# Altium PCB BCM_ECU_revA_V3.PcbDoc (part 7 of 7)
Units mm, origin at the board's own origin, x right, y up, seen from the top; angles counter-clockwise.
Board outline 109.5 x 156 mm, 4 copper layers (TOP SIG, GND, PWR, BOT SIG), stack 0.603 mm thick; 580 components, 446 nets, 1965 pads, 870 vias.
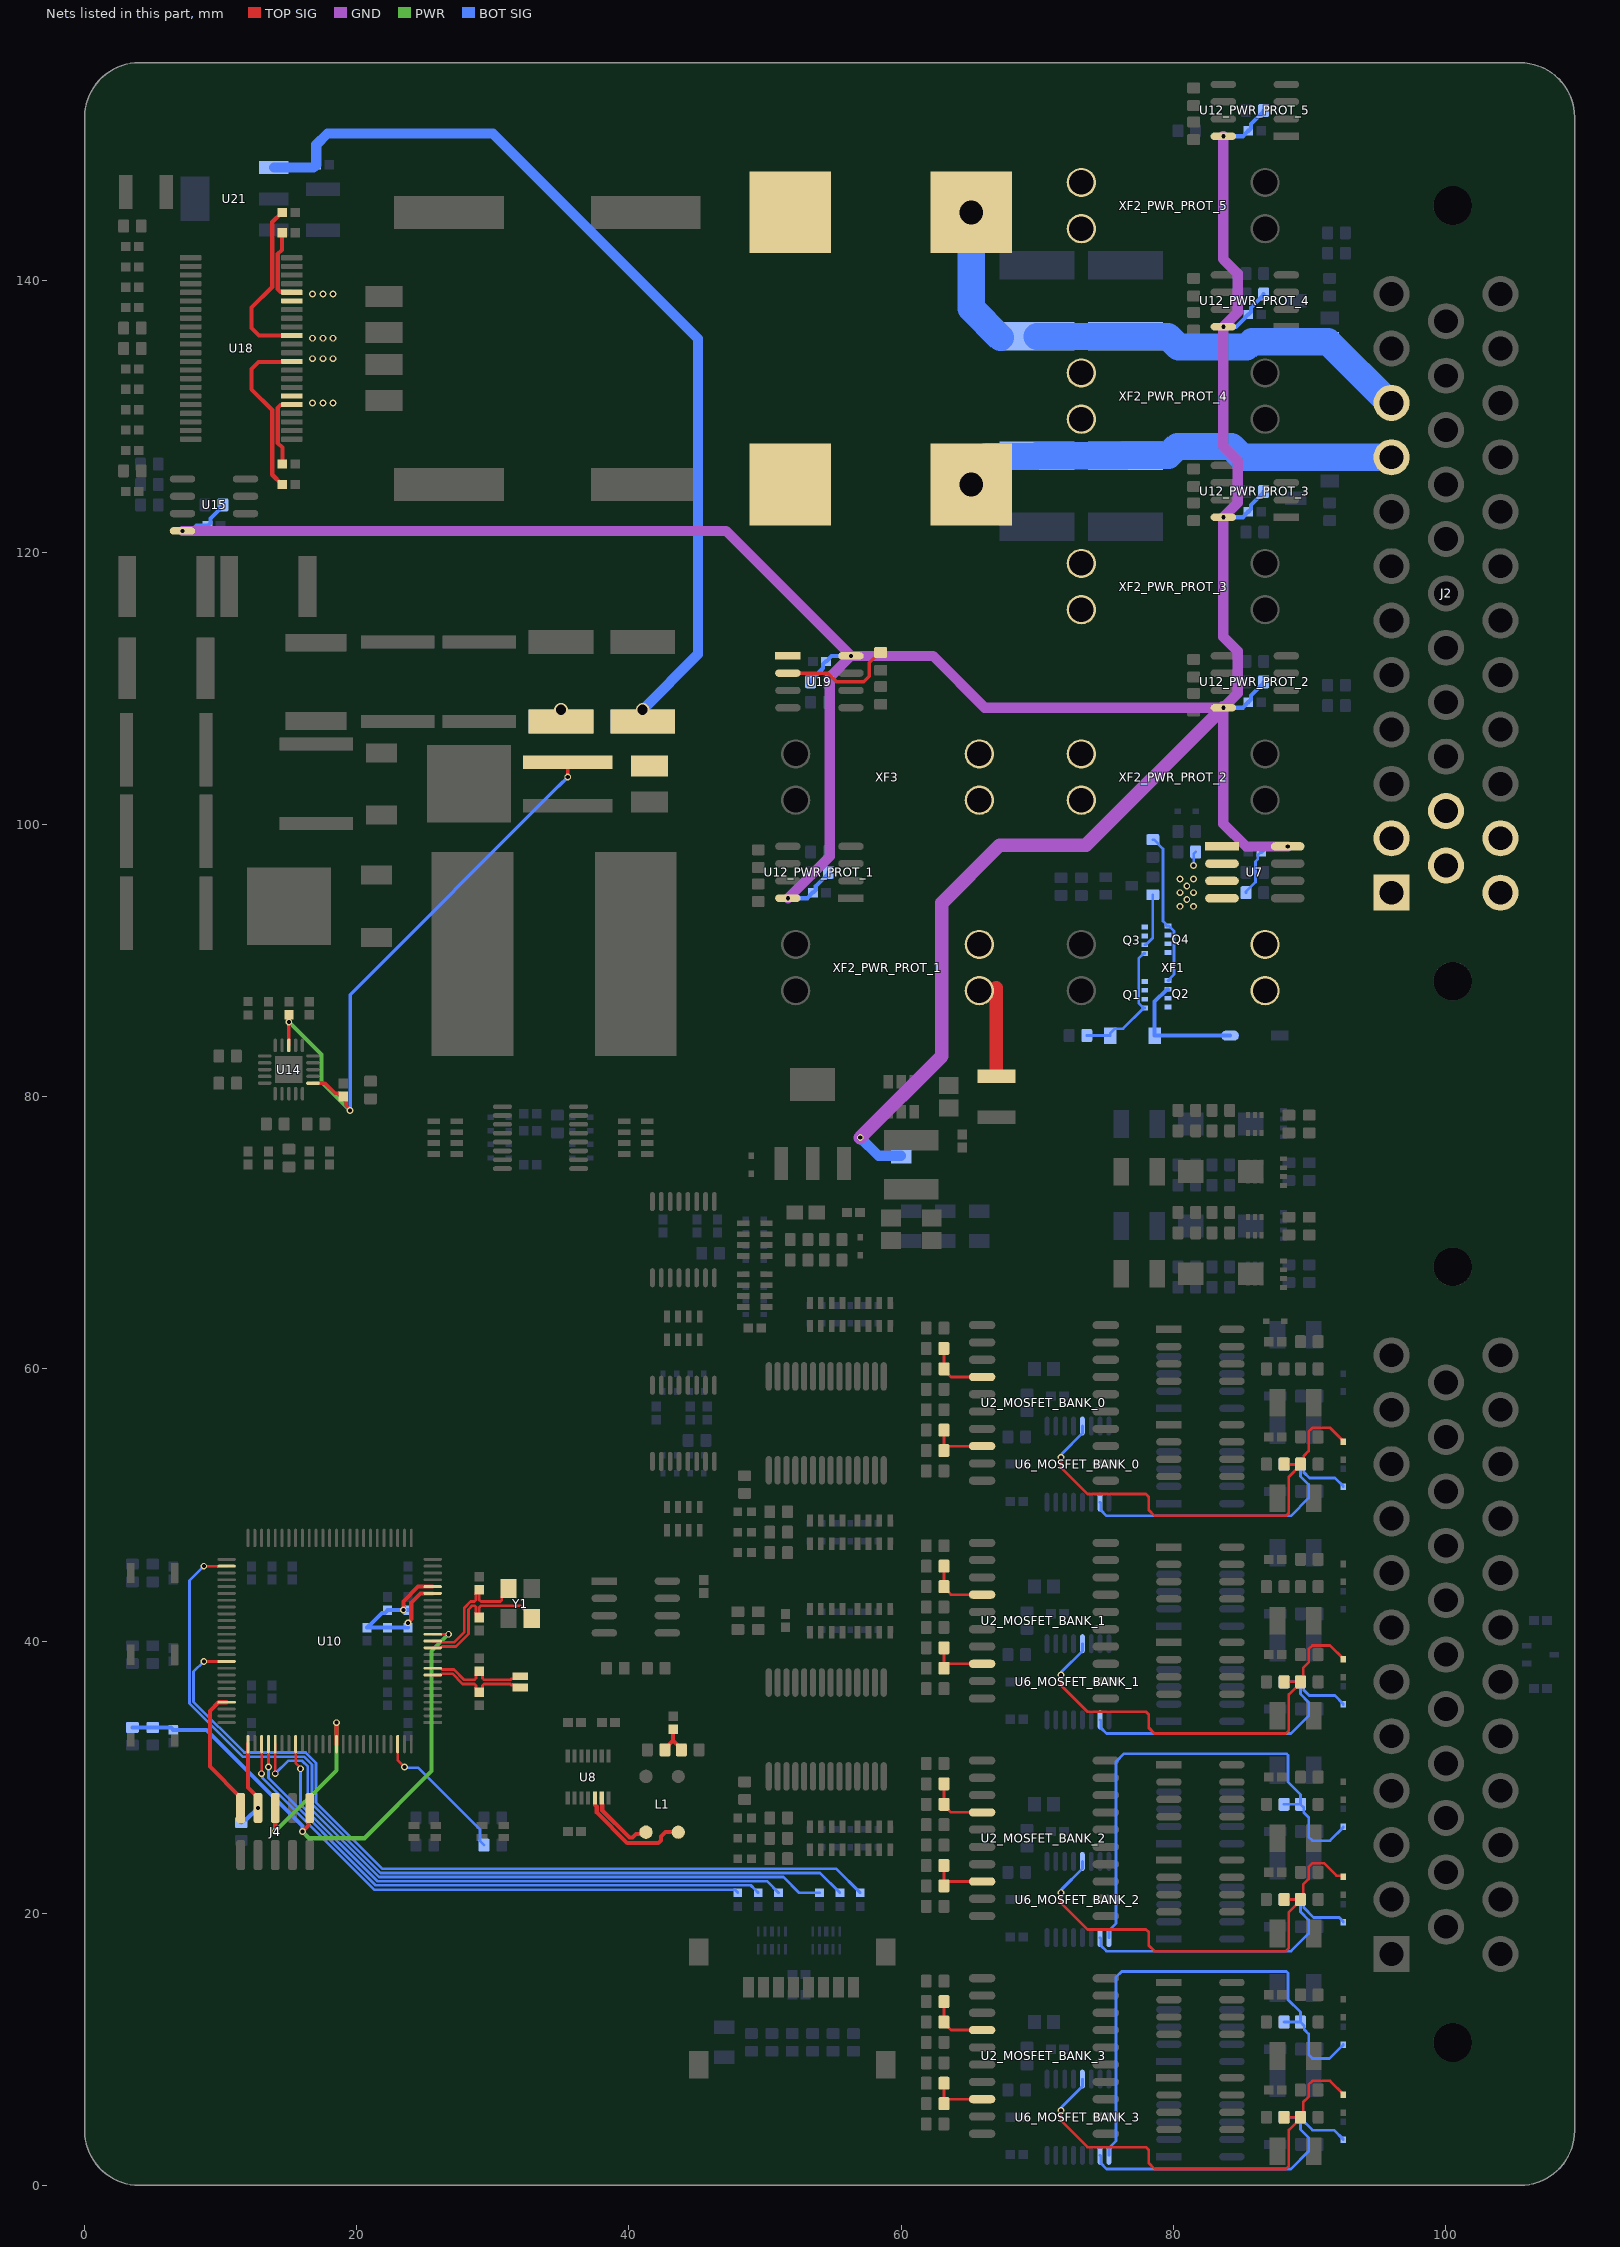
[diagram p8: the nets of this part, all layers, seen from the top]

## Via types
v1: diameter 0.5, hole 0.3, TOP SIG to BOT SIG, tented both sides, 797 vias
v2: diameter 1, hole 0.75, TOP SIG to BOT SIG, tented both sides, 56 vias
v3: diameter 4, hole 2.5, TOP SIG to BOT SIG, 9 vias
v4: diameter 0.75, hole 0.5, TOP SIG to BOT SIG, tented both sides, 6 vias
v5: diameter 2, hole 1.75, TOP SIG to BOT SIG, tented both sides, 2 vias

## Nets (pads, with @x,y where several pads share a name; then routed paths per layer and width w, separated by ;. In a path a pad name is that pad's centre, name@x,y a point inside that pad or via, vN(x,y) a via of type N, cw(c..) or ccw(c..) an arc to the next point about the centre after c; other vN are vias at no path point) (continued)
PD_2_MOSFET_BANK_2: D42_MOSFET_BANK_2.1 R19_MOSFET_BANK_2.1 R23_MOSFET_BANK_2.1 U6_MOSFET_BANK_2.9 | length 37
  BOT SIG w0.2: U6_MOSFET_BANK_2.9@75.275,18.2 75.275,18.725 75.802,19.252 75.802,31.125 76.394,31.718 88.322,31.718 88.44,31.6 88.44,29.634 89.35,28.724 R23_MOSFET_BANK_2.1@89.35,28 ; R19_MOSFET_BANK_2.1@88.15,28 R23_MOSFET_BANK_2.1@89.35,28 ; D42_MOSFET_BANK_2.1@92.5,26.34 92.5,26.3 91.524,25.324 90.225,25.324 89.952,25.597 89.952,27.048 89.595,27.405 89.595,27.755 R23_MOSFET_BANK_2.1@89.35,28
PD_2_MOSFET_BANK_3: D42_MOSFET_BANK_3.1 R19_MOSFET_BANK_3.1 R23_MOSFET_BANK_3.1 U6_MOSFET_BANK_3.9 | length 37.1
  BOT SIG w0.2: U6_MOSFET_BANK_3.9@75.275,2.2 75.275,2.725 75.802,3.252 75.802,15.302 76.218,15.718 88.322,15.718 88.44,15.6 88.44,13.634 89.35,12.724 R23_MOSFET_BANK_3.1@89.35,12 ; R19_MOSFET_BANK_3.1@88.15,12 R23_MOSFET_BANK_3.1@89.35,12 ; D42_MOSFET_BANK_3.1@92.5,10.34 92.5,10.3 92.4,10.2 92.36,10.2 91.484,9.324 90.225,9.324 89.952,9.597 89.952,11.118 89.63,11.44 89.63,11.72 R23_MOSFET_BANK_3.1@89.35,12
PD_3_MOSFET_BANK_0: D43_MOSFET_BANK_0.1 R20_MOSFET_BANK_0.1 R24_MOSFET_BANK_0.1 U6_MOSFET_BANK_0.5 | length 33.5
  TOP SIG w0.2: v1(71.75,53.5) 71.75,52.75 73.7,50.8 78,50.8 78.2,50.6 78.2,49.627 78.625,49.202 88.275,49.202 88.5,49.427 88.5,52.075 89.35,52.925 R24_MOSFET_BANK_0.1@89.35,53 ; R20_MOSFET_BANK_0.1@88.15,53 R24_MOSFET_BANK_0.1@89.35,53 ; D43_MOSFET_BANK_0.1@92.5,54.66 92.5,54.7 91.523,55.677 90.225,55.677 89.952,55.403 89.952,53.952 89.595,53.595 89.595,53.246 R24_MOSFET_BANK_0.1@89.35,53
  BOT SIG w0.2: v1(71.75,53.5) 71.807,53.558 71.807,53.758 73.325,55.275 U6_MOSFET_BANK_0.5@73.325,55.8
PD_3_MOSFET_BANK_1: D43_MOSFET_BANK_1.1 R20_MOSFET_BANK_1.1 R24_MOSFET_BANK_1.1 U6_MOSFET_BANK_1.5 | length 33.5
  TOP SIG w0.2: v1(71.75,37.5) 71.75,36.75 73.7,34.8 78,34.8 78.2,34.6 78.2,33.627 78.625,33.202 88.275,33.202 88.5,33.427 88.5,36.075 89.35,36.925 R24_MOSFET_BANK_1.1@89.35,37 ; R20_MOSFET_BANK_1.1@88.15,37 R24_MOSFET_BANK_1.1@89.35,37 ; D43_MOSFET_BANK_1.1@92.5,38.66 92.5,38.7 91.523,39.677 90.225,39.677 89.952,39.403 89.952,38.432 89.55,38.031 89.55,37.2 R24_MOSFET_BANK_1.1@89.35,37
  BOT SIG w0.2: v1(71.75,37.5) 71.807,37.558 71.807,37.758 73.325,39.275 U6_MOSFET_BANK_1.5@73.325,39.8
PD_3_MOSFET_BANK_2: D43_MOSFET_BANK_2.1 R20_MOSFET_BANK_2.1 R24_MOSFET_BANK_2.1 U6_MOSFET_BANK_2.5 | length 33.4
  TOP SIG w0.2: v1(71.75,21.5) 71.75,20.75 73.7,18.8 78,18.8 78.2,18.6 78.2,17.627 78.625,17.202 88.275,17.202 88.5,17.427 88.5,20.075 89.35,20.925 R24_MOSFET_BANK_2.1@89.35,21 ; R20_MOSFET_BANK_2.1@88.15,21 R24_MOSFET_BANK_2.1@89.35,21 ; D43_MOSFET_BANK_2.1@92.5,22.66 92.408,22.752 92,22.752 91.075,23.677 90.225,23.677 89.952,23.403 89.952,22.5 89.55,22.099 89.55,21.2 R24_MOSFET_BANK_2.1@89.35,21
  BOT SIG w0.2: v1(71.75,21.5) 71.807,21.558 71.807,21.758 73.325,23.275 U6_MOSFET_BANK_2.5@73.325,23.8
PD_3_MOSFET_BANK_3: D43_MOSFET_BANK_3.1 R20_MOSFET_BANK_3.1 R24_MOSFET_BANK_3.1 U6_MOSFET_BANK_3.5 | length 33.5
  TOP SIG w0.2: v1(71.75,5.5) 71.75,4.75 73.7,2.8 78,2.8 78.2,2.6 78.2,1.627 78.625,1.202 88.275,1.202 88.5,1.427 88.5,4.075 89.55,5.125 89.55,6.099 89.952,6.5 89.952,7.403 90.225,7.677 91.523,7.677 92.5,6.7 D43_MOSFET_BANK_3.1@92.5,6.66 ; R20_MOSFET_BANK_3.1@88.15,5 R24_MOSFET_BANK_3.1@89.35,5
  BOT SIG w0.2: v1(71.75,5.5) 71.807,5.558 71.807,5.758 73.325,7.275 U6_MOSFET_BANK_3.5@73.325,7.8
PD_4_MOSFET_BANK_0: D44_MOSFET_BANK_0.1 R21_MOSFET_BANK_0.1 R25_MOSFET_BANK_0.1 U6_MOSFET_BANK_0.10 | length 24.4
  BOT SIG w0.2: U6_MOSFET_BANK_0.10@74.625,50.2 74.674,50.151 74.674,49.626 75.098,49.202 88.653,49.202 89.952,50.5 89.952,51.5 89.35,52.102 R25_MOSFET_BANK_0.1@89.35,52.65 ; R21_MOSFET_BANK_0.1@88.15,53 R25_MOSFET_BANK_0.1@89.35,53 R25_MOSFET_BANK_0.1@89.35,52.65 ; D44_MOSFET_BANK_0.1@92.5,51.34 92.5,51.38 91.897,51.983 90.017,51.983 89.595,52.405 89.595,52.625 89.57,52.65 R25_MOSFET_BANK_0.1@89.35,52.65
PD_4_MOSFET_BANK_1: D44_MOSFET_BANK_1.1 R21_MOSFET_BANK_1.1 R25_MOSFET_BANK_1.1 U6_MOSFET_BANK_1.10 | length 24.4
  BOT SIG w0.2: U6_MOSFET_BANK_1.10@74.625,34.2 74.674,34.151 74.674,33.626 75.098,33.202 88.653,33.202 89.952,34.5 89.952,35.5 89.35,36.102 R25_MOSFET_BANK_1.1@89.35,36.65 ; R21_MOSFET_BANK_1.1@88.15,37 R25_MOSFET_BANK_1.1@89.35,37 R25_MOSFET_BANK_1.1@89.35,36.65 ; D44_MOSFET_BANK_1.1@92.5,35.34 92.5,35.38 91.88,36 90,36 89.595,36.405 89.595,36.625 89.57,36.65 R25_MOSFET_BANK_1.1@89.35,36.65
PD_4_MOSFET_BANK_2: D44_MOSFET_BANK_2.1 R21_MOSFET_BANK_2.1 R25_MOSFET_BANK_2.1 U6_MOSFET_BANK_2.10 | length 24.4
  BOT SIG w0.2: U6_MOSFET_BANK_2.10@74.625,18.2 74.674,18.151 74.674,17.626 75.098,17.202 88.653,17.202 89.952,18.5 89.952,19.5 89.35,20.102 R25_MOSFET_BANK_2.1@89.35,20.65 ; R21_MOSFET_BANK_2.1@88.15,21 R25_MOSFET_BANK_2.1@89.35,21 R25_MOSFET_BANK_2.1@89.35,20.65 ; D44_MOSFET_BANK_2.1@92.5,19.34 92.5,19.38 92.203,19.677 90.323,19.677 89.595,20.405 89.595,20.625 89.57,20.65 R25_MOSFET_BANK_2.1@89.35,20.65
PD_4_MOSFET_BANK_3: D44_MOSFET_BANK_3.1 R21_MOSFET_BANK_3.1 R25_MOSFET_BANK_3.1 U6_MOSFET_BANK_3.10 | length 24.4
  BOT SIG w0.2: U6_MOSFET_BANK_3.10@74.625,2.2 74.674,2.151 74.674,1.626 75.098,1.202 88.653,1.202 89.952,2.5 89.952,3.5 89.35,4.102 R25_MOSFET_BANK_3.1@89.35,5 ; R21_MOSFET_BANK_3.1@88.15,5 R25_MOSFET_BANK_3.1@89.35,5 ; D44_MOSFET_BANK_3.1@92.5,3.34 92.5,3.38 91.827,4.053 90.223,4.053 89.35,4.925 R25_MOSFET_BANK_3.1@89.35,5
PRE_BST_AMP_VCC: C52.1 C64.1 C65.1 C66.1 C67.1 C110.1 C111.1 C117.2 R85.1 R109.1 U14.1 U14.8 U19.1 U19.2 U21.1 | length 123.5
  TOP SIG w0.254: U14.8@15,83.775 v1(15,85.5) C67.1@15,86.021 ; U14.1@16.775,81 17.656,81 18.404,80.252 18.791,80.252 19,80.043 C52.1@19,80.021 19.209,79.812 19.209,79.357 19.5,79.067 v1(19.5,79) ; v1(35.5,103.5) R85.1@35.5,104.6 ; U19.2@51.684,111.135 54.615,111.135 55.25,110.5 57.25,110.5 57.67,110.92 57.67,111.896 58.425,112.65 R109.1@58.5,112.65
  PWR w0.3: v1(15,85.5) 17.4,83.1 17.4,81.1 v1(19.5,79)
  BOT SIG w0.254: v1(19.5,79) 19.5,87.503 34.853,102.856 34.858,102.856 35.5,103.497 v1(35.5,103.5)
  BOT SIG w0.75: U21.1@13.9,148.3 16.821,148.3 C117.2@17.021,148.5 17.021,149.982 17.839,150.8 30,150.8 45.065,135.735 45.065,112.515 v2(41,108.45)
  other v2: 35,108.45
PRE_CAN_N: L1.3 U8.12 | length 8.5
  TOP SIG w0.3: U8.12@37.5,28.457 37.503,28.455 37.503,27.958 37.633,27.827 37.633,27.387 39.871,25.148 42.154,25.148 42.352,25.346 42.352,25.624 42.678,25.95 L1.3@43.625,25.95
PRE_CAN_P: L1.2 U8.13 | length 5.1
  TOP SIG w0.3: U8.13@38,28.457 38.003,28.455 38.003,28.025 38.034,27.994 38.034,27.553 40.024,25.563 40.273,25.563 40.527,25.818 41.118,25.818 L1.2@41.25,25.95
PRE_OUT_A: C45.2 C81.2 L2.1 U18.32 U18.39 U18.40 | length 18.1
  TOP SIG w0.3: C81.2@14.521,125 14.5,125 13.782,125.718 13.782,130.468 12.25,132 12.25,133.5 12.758,134.008 15.18,134.008 U18.32@15.22,134.048 ; C45.2@14.521,143.5 14.5,143.479 14.5,142.251 14.183,141.934 14.183,139.379 14.395,139.168 15.18,139.168 U18.40@15.22,139.128
  other v1: 16.75,134.25 17.5,134.25 18.25,134.25 16.75,139 17.5,139 18.25,139
PRE_OUT_D: C80.2 C82.2 L4.1 U18.27 U18.28 U18.35 | length 18.1
  TOP SIG w0.3: C82.2@14.521,126.5 14.521,127.728 14.183,128.066 14.183,130.621 14.395,130.833 15.18,130.833 U18.27@15.22,130.873 ; C80.2@14.521,145 14.5,145 13.782,144.282 13.782,139.532 12.25,138 12.25,136.5 12.797,135.953 U18.35@15.22,135.953
  other v1: 16.75,131 17.5,131 18.25,131 16.75,135.75 17.5,135.75 18.25,135.75
PRE_SHUNT: Q2.5-6-7-8 Q4.5-6-7-8 U7.3 U7.4
  other v1: 80.5,94 81.5,94 81,94.5 80.5,95 81.5,95 81,95.5 80.5,96 81.5,96
PRE_VCC: D1.1 D2.2 Q1.1 Q1.2 Q1.3 Q2.1 Q2.2 Q2.3 Q3.1 Q3.2 Q3.3 Q4.1 Q4.2 Q4.3 R28.2 | length 13.4
  BOT SIG w0.2: Q3.3@77.91,91.175 77.985,91.175 78.5,91.69 R28.2@78.5,94.85
  BOT SIG w0.3: Q2.3@79.61,87.9 79.535,87.9 78.635,87 D1.1@78.635,84.5 D2.2@84.175,84.5
PWR_IN: J2.1 J2.2 J2.13 J2.14 J2.24 J2.25 XF1.1 XF1.2
PWR_MOSFET: Q2.4 Q4.4 R69.2 | length 11.4
  BOT SIG w0.2: R69.2@78.5,98.9 78.575,98.9 79.25,98.225 79.25,92.91 79.46,92.7 79.46,92.625 79.535,92.55 79.685,92.55 80.062,92.174 80.062,89.002 79.76,88.7 79.76,88.625 79.685,88.55 Q2.4@79.61,88.55
PWR_OUT: F1.1 R29.2 U7.1 U7.2 XF2_PWR_PROT_1.1 XF2_PWR_PROT_1.2 XF2_PWR_PROT_2.1 XF2_PWR_PROT_2.2 XF2_PWR_PROT_3.1 XF2_PWR_PROT_3.2 XF2_PWR_PROT_4.1 XF2_PWR_PROT_4.2 XF2_PWR_PROT_5.1 XF2_PWR_PROT_5.2 XF3.1 XF3.2 | length 7.6
  TOP SIG w1: F1.1@67,81.5 67,88
  BOT SIG w0.2: v1(81.5,97) 81.5,97.85 R29.2@81.65,98
PWR_SENSE_3V3: C8.1 C40_PWR_PROT_1.1 C40_PWR_PROT_2.1 C40_PWR_PROT_3.1 C40_PWR_PROT_4.1 C40_PWR_PROT_5.1 C104.1 C109.1 F8.2 R26.2 R50_PWR_PROT_1.1 R50_PWR_PROT_2.1 R50_PWR_PROT_3.1 R50_PWR_PROT_4.1 R50_PWR_PROT_5.1 R88.1 R107.1 U7.8 U12_PWR_PROT_1.8 U12_PWR_PROT_2.8 U12_PWR_PROT_3.8 U12_PWR_PROT_4.8 U12_PWR_PROT_5.8 U15.8 U19.8 | length 243.9
  GND w0.75: v1(7.184,121.595) 47.126,121.595 v1(56.316,112.405) ; v1(51.684,94.595) 54.75,97.661 54.75,110.839 v1(56.316,112.405) ; v1(83.684,150.595) 83.684,141.566 84.75,140.5 84.75,137.661 v1(83.684,136.595) 83.684,127.816 84.75,126.75 84.75,123.661 v1(83.684,122.595) 83.684,113.816 84.75,112.75 84.75,109.661 v1(83.684,108.595) ; v1(88.416,98.405) 85.345,98.405 83.684,100.066 v1(83.684,108.595) ; v1(56.316,112.405) 62.345,112.405 66.155,108.595 v1(83.684,108.595)
  GND w1: v1(57,77) 63,83 63,94.25 67.25,98.5 73.589,98.5 v1(83.684,108.595)
  BOT SIG w0.2: R26.2@85.35,95 85.35,95.075 86.048,95.774 86.048,97.291 86.221,97.463 86.221,97.764 86.457,98 C8.1@86.479,98
  BOT SIG w0.3: v1(7.184,121.595) 7.222,121.633 7.847,121.633 8.214,122 C104.1@9.021,122 9.043,122 9.229,122.186 9.229,122.504 10.15,123.425 R88.1@10.15,123.5 ; v1(51.684,94.595) 53.116,94.595 53.314,94.792 53.314,94.814 53.5,95 C40_PWR_PROT_1.1@53.521,95 53.543,95 53.729,95.186 53.729,95.504 54.65,96.425 R50_PWR_PROT_1.1@54.65,96.5 ; R107.1@53.35,110.5 53.35,110.575 54.271,111.496 54.271,111.814 54.457,112 C109.1@54.479,112 54.5,112 54.686,112.186 54.686,112.208 54.884,112.405 v1(56.316,112.405) ; v1(83.684,108.595) 85.116,108.595 85.314,108.792 85.314,108.814 85.5,109 C40_PWR_PROT_2.1@85.521,109 85.543,109 85.729,109.186 85.729,109.504 86.65,110.425 R50_PWR_PROT_2.1@86.65,110.5 ; v1(83.684,122.595) 85.116,122.595 85.314,122.792 85.314,122.814 85.5,123 C40_PWR_PROT_3.1@85.521,123 85.543,123 85.729,123.186 85.729,123.504 86.65,124.425 R50_PWR_PROT_3.1@86.65,124.5 ; v1(83.684,136.595) 84.616,136.595 85.314,137.292 85.314,137.314 85.5,137.5 C40_PWR_PROT_4.1@85.521,137.5 85.543,137.5 85.729,137.686 85.729,138.004 86.65,138.925 R50_PWR_PROT_4.1@86.65,139 ; v1(83.684,150.595) 85.116,150.595 85.314,150.792 85.314,150.814 85.5,151 C40_PWR_PROT_5.1@85.521,151 85.543,151 85.729,151.186 85.729,151.504 86.65,152.425 R50_PWR_PROT_5.1@86.65,152.5 ; C8.1@86.5,98 86.686,98.186 86.686,98.208 86.884,98.405 v1(88.416,98.405)
  BOT SIG w0.75: v1(57,77) 58.336,75.664 F8.2@60,75.664
R_LED: R44.1 U10.98 | length 10.6
  TOP SIG w0.2: U10.98@23,32.425 23,31.25 v1(23.5,30.75)
  BOT SIG w0.2: v1(23.5,30.75) 23.557,30.693 24.507,30.693 29.055,26.145 29.055,25.295 R44.1@29.35,25
RESETN: C23.1 J4.10 R40.1 R42.2 U10.14 | length 41.4
  TOP SIG w0.2: U10.14@25.576,40.5 v1(26.75,40.5)
  TOP SIG w0.3: v1(16,26) 16.452,26.452 16.452,27.702 J4.10@16.5,27.75
  PWR w0.3: v1(16,26) 16.497,25.503 20.567,25.503 25.5,30.436 25.5,39.25 v1(26.75,40.5)
  BOT SIG w0.3: R42.2@3.5,33.65 6.35,33.65 C23.1@6.5,33.5 ; C23.1@6.5,33.479 6.5,33.457 8.943,33.457 16,26.4 v1(16,26)
RP_MOS_LINK: D1.2 Q1.4 Q3.4 R27.2 | length 9.6
  BOT SIG w0.2: R27.2@73.65,84.5 D1.2@75.365,84.5 75.365,84.655 75.72,85.01 76.32,85.01 Q1.4@77.835,86.525 ; Q1.4@77.91,86.525 Q1.4@77.835,86.525 ; Q3.4@77.91,90.525 77.835,90.525 77.458,90.149 77.458,86.902 Q1.4@77.835,86.525
SD_CLK: R117.1 U10.80 | length 48.3
  TOP SIG w0.2: v1(14,30.25) U10.80@14,32.425
  BOT SIG w0.2: v1(14,30.25) 14.947,31.197 15.988,31.197 16.397,30.788 16.397,27.883 21.625,22.655 48.25,22.655 51.345,22.655 52.5,21.5 R117.1@54,21.5
SD_CMD: R118.1 U10.83 | length 42.4
  TOP SIG w0.2: U10.83@15.5,32.425 15.5,31.028 15.864,30.664 v1(15.864,30.614)
  BOT SIG w0.2: v1(15.864,30.614) 15.864,27.989 21.5,22.353 50.147,22.353 R118.1@51,21.5
SD_DAT0: R112.1 U10.52 | length 67.5
  TOP SIG w0.2: v1(8.75,45.5) U10.52@10.425,45.5
  BOT SIG w0.2: v1(8.75,45.5) 7.698,44.448 7.698,35.405 11.605,31.498 16.113,31.498 16.698,30.913 16.698,28.008 21.75,22.956 54.044,22.956 R112.1@55.5,21.5
SD_DAT1: R113.1 U10.66 | length 61.5
  TOP SIG w0.2: v1(8.75,38.5) U10.66@10.425,38.5
  BOT SIG w0.2: v1(8.75,38.5) 8,37.75 8,35.53 11.73,31.8 16.238,31.8 17,31.038 17,28.133 21.875,23.258 55.242,23.258 R113.1@57,21.5
SD_DAT2: R114.1 U10.78 | length 40.9
  TOP SIG w0.2: v1(13,30.25) 13,31.118 ; 13,31.118 U10.78@13,32.425
  BOT SIG w0.2: v1(13,30.25) 13.057,30.193 13.057,29.943 21.275,21.725 47.775,21.725 R114.1@48,21.5
SD_DAT3: R115.1 U10.79 | length 42
  TOP SIG w0.2: v1(13.5,30.75) U10.79@13.5,32.425
  BOT SIG w0.2: v1(13.5,30.75) 13.5,29.927 21.375,22.052 48.948,22.052 49.275,21.725 R115.1@49.5,21.5
SPKR_A: C46.1 C47.1 C48.1 C78.1 J2.10 L2.2 | length 38.5
  BOT SIG w2: v5(65.15,145) 65.15,137.95 C46.1@67.3,135.8 ; C46.1@70,135.89 C47.1@76.5,135.89 79.61,135.89 80.4,135.1 85.391,135.1 85.791,135.5 C48.1@89,135.5 91.374,135.5 95.874,131 J2.10@96.05,131
SPKR_B: C83.1 C84.1 C85.1 C86.1 J2.9 L4.2 | length 33.1
  BOT SIG w2: v5(65.15,125) 65.15,125.898 66.322,127.069 69.959,127.069 C84.1@70,127.11 C83.1@76.5,127.11 ; C83.1@76.334,127.151 79.651,127.151 80.305,127.805 84.264,127.805 85.069,127 J2.9@96.05,127
STAT_12_MOSFET_BANK_0: R5_MOSFET_BANK_0.2 R7_MOSFET_BANK_0.1 U2_MOSFET_BANK_0.4 | length 4.5
  TOP SIG w0.2: R5_MOSFET_BANK_0.2@63.15,59.925 63.67,59.405 U2_MOSFET_BANK_0.4@65.95,59.405 ; R5_MOSFET_BANK_0.2@63.15,60 R7_MOSFET_BANK_0.1@63.15,61.5
STAT_12_MOSFET_BANK_1: R5_MOSFET_BANK_1.2 R7_MOSFET_BANK_1.1 U2_MOSFET_BANK_1.4 | length 4.5
  TOP SIG w0.2: R5_MOSFET_BANK_1.2@63.15,43.925 63.67,43.405 U2_MOSFET_BANK_1.4@65.95,43.405 ; R5_MOSFET_BANK_1.2@63.15,44 R7_MOSFET_BANK_1.1@63.15,45.5
STAT_12_MOSFET_BANK_2: R5_MOSFET_BANK_2.2 R7_MOSFET_BANK_2.1 U2_MOSFET_BANK_2.4 | length 4.5
  TOP SIG w0.2: R5_MOSFET_BANK_2.2@63.15,27.925 63.67,27.405 U2_MOSFET_BANK_2.4@65.95,27.405 ; R5_MOSFET_BANK_2.2@63.15,28 R7_MOSFET_BANK_2.1@63.15,29.5
STAT_12_MOSFET_BANK_3: R5_MOSFET_BANK_3.2 R7_MOSFET_BANK_3.1 U2_MOSFET_BANK_3.4 | length 4.6
  TOP SIG w0.2: R7_MOSFET_BANK_3.1@63.15,13.5 63.15,11.925 63.67,11.405 U2_MOSFET_BANK_3.4@65.95,11.405
STAT_34_MOSFET_BANK_0: R6_MOSFET_BANK_0.2 R8_MOSFET_BANK_0.1 U2_MOSFET_BANK_0.8 | length 4.4
  TOP SIG w0.2: R6_MOSFET_BANK_0.2@63.15,54 R8_MOSFET_BANK_0.1@63.15,55.5 ; R6_MOSFET_BANK_0.2@63.15,54.025 63.45,54.325 U2_MOSFET_BANK_0.8@65.95,54.325
STAT_34_MOSFET_BANK_1: R6_MOSFET_BANK_1.2 R8_MOSFET_BANK_1.1 U2_MOSFET_BANK_1.8 | length 4.4
  TOP SIG w0.2: R8_MOSFET_BANK_1.1@63.15,39.5 R6_MOSFET_BANK_1.2@63.15,38 63.15,38.025 63.45,38.325 U2_MOSFET_BANK_1.8@65.95,38.325
STAT_34_MOSFET_BANK_2: R6_MOSFET_BANK_2.2 R8_MOSFET_BANK_2.1 U2_MOSFET_BANK_2.8 | length 4.4
  TOP SIG w0.2: R6_MOSFET_BANK_2.2@63.15,22 R8_MOSFET_BANK_2.1@63.15,23.5 ; R6_MOSFET_BANK_2.2@63.15,22.025 63.45,22.325 U2_MOSFET_BANK_2.8@65.95,22.325
STAT_34_MOSFET_BANK_3: R6_MOSFET_BANK_3.2 R8_MOSFET_BANK_3.1 U2_MOSFET_BANK_3.8 | length 4.4
  TOP SIG w0.2: R8_MOSFET_BANK_3.1@63.15,7.5 R6_MOSFET_BANK_3.2@63.15,6 63.15,6.025 63.45,6.325 U2_MOSFET_BANK_3.8@65.95,6.325
SWCLK: J4.4 R38.1 U10.76 | length 6.7
  TOP SIG w0.3: U10.76@12,32.425 12,29.235 12.73,28.505 v1(12.73,27.73)
  BOT SIG w0.3: R38.1@11.5,26.65 11.75,26.9 11.9,26.9 v1(12.73,27.73)
SWDIO: J4.2 U10.72 | length 9.6
  TOP SIG w0.3: U10.72@10.425,35.5 9.847,35.5 9.2,34.853 9.2,30.765 11.46,28.505 J4.2@11.46,27.73
SWO: J4.6 U10.89 | length 13.2
  TOP SIG w0.3: v1(14,26) J4.6@14,27.73 ; U10.89@18.5,32.425 v1(18.5,34)
  PWR w0.3: v1(14,26) 18.5,30.5 v1(18.5,34)
TERM_CAP: C17.2 R35.1 R37.2 | length 2.7
  TOP SIG w0.3: R37.2@42.65,32 42.65,32.075 43.25,32.675 ; C17.2@43.25,33.521 43.25,32.675 ; R35.1@43.85,32 43.85,32.075 43.25,32.675
VDDA: C30.1 C31.1 C38.1 C39.1 FB1.2 U10.20 U10.21 | length 13.3
  TOP SIG w0.3: v1(23.414,42.271) 23.414,42.914 24.5,44 U10.21@25.576,44 ; v1(23.75,41.336) 23.75,41.362 24,41.612 24,42.824 24.676,43.5 U10.20@25.576,43.5
  BOT SIG w0.3: C39.1@23.75,40.979 C38.1@22.25,40.979 FB1.2@20.75,40.979 20.75,41 20.936,41.186 20.958,41.186 21.835,42.064 22.064,42.064 22.25,42.25 C30.1@22.25,42.271 v1(23.414,42.271) C31.1@23.75,42.271
X32_N: C21.1 U10.9 Y2.2 | length 7.7
  TOP SIG w0.2: U10.9@25.576,38 26.15,38 26.25,37.901 27.141,37.901 27.891,37.151 28.647,37.151 28.764,37.268 28.764,37.535 C21.1@29,37.771 29.236,37.535 29.236,37.268 29.353,37.151 31.282,37.151 31.356,37.225 31.812,37.225 Y2.2@32,37.413
X32_P: C20.1 U10.8 Y2.1 | length 7.7
  TOP SIG w0.2: U10.8@25.576,37.5 26.15,37.5 26.25,37.599 27.016,37.599 27.766,36.849 28.647,36.849 28.764,36.732 28.764,36.465 C20.1@29,36.229 29.236,36.465 29.236,36.732 29.353,36.849 31.282,36.849 31.356,36.775 31.812,36.775 Y2.1@32,36.588
X_N: C18.1 U10.13 Y1.1 | length 10.7
  TOP SIG w0.2: U10.13@25.576,40 26.15,40 26.25,39.901 27.151,39.901 27.9,40.65 27.9,42.445 28.356,42.901 28.647,42.901 28.764,43.018 28.764,43.535 C18.1@29,43.771 29,43.018 29.117,42.901 30.541,42.901 30.658,43.018 30.658,43.25 30.883,43.475 31.55,43.475 Y1.1@31.125,43.9
X_P: C19.1 U10.12 Y1.3 | length 11.6
  TOP SIG w0.2: U10.12@25.576,39.5 26.15,39.5 26.25,39.599 27.276,39.599 28.202,40.525 28.202,42.32 28.481,42.599 28.647,42.599 28.764,42.482 28.764,41.965 C19.1@29,41.729 29,42.482 29.117,42.599 32.001,42.599 32.875,41.725 Y1.3@32.875,41.6
pads on no net: J1. J2. J4.7 J4.8 J4.9 R99_IO_CHECKER_0.4 R99_IO_CHECKER_0.5 R99_IO_CHECKER_1.4 R99_IO_CHECKER_1.5 R101_IO_CHECKER_0.4 R101_IO_CHECKER_0.5 R101_IO_CHECKER_1.4 R101_IO_CHECKER_1.5 U1_MOSFET_BANK_0.6 U1_MOSFET_BANK_1.6 U1_MOSFET_BANK_2.6 U1_MOSFET_BANK_3.6 U3_MOSFET_BANK_0.6 U3_MOSFET_BANK_1.6 U3_MOSFET_BANK_2.6 U3_MOSFET_BANK_3.6 U4_MOSFET_BANK_0.6 U4_MOSFET_BANK_1.6 U4_MOSFET_BANK_2.6 U4_MOSFET_BANK_3.6 U5_MOSFET_BANK_0.6 U5_MOSFET_BANK_1.6 U5_MOSFET_BANK_2.6 U5_MOSFET_BANK_3.6 U17_IO_CHECKER_0.8 U17_IO_CHECKER_0.11 U17_IO_CHECKER_0.14 U17_IO_CHECKER_0.28 U17_IO_CHECKER_1.8 U17_IO_CHECKER_1.11 U17_IO_CHECKER_1.14 U17_IO_CHECKER_1.28 U18.9 U18.10

## Polygon pours and split planes (outlines as drawn)
GND on TOP SIG "GND_L01_P430" (solid, remove dead copper, pour order 430): 0,4 0,152 cw(c4,152) 4,156 106,156 cw(c106,152) 110,152 110,4 cw(c106,4) 106,0 4,0 cw(c4,4)
NetC16_1 on TOP SIG "NETC16_1_L01_P322" (solid, pour order 322): 58.5,81.75 60.5,81.75 60.5,80.5 62.5,80.5 62.5,80 68.75,80 68.75,77.75 61.5,77.75 61.5,79.5 58.5,79.5
NetC42_2 on TOP SIG "NETC42_2_L01_P321" (solid, pour order 321): 59.5,79.5 59.5,78.25 58.5,78.25 58.5,75.75 63,75.75 63,77.75 61.5,77.75 61.5,78.25 60.5,78.25 60.5,79.5
PWR_OUT on TOP SIG "PWR_OUT_L01_P409" (solid, remove dead copper, pour order 409): 80,96.5 85,96.5 85,107.25 80,107.25 80,149 70,149 70,107 64,107 64,86 70,86 70,93.5 80,93.5
3V3 on TOP SIG "3V3_L01_P320" (solid, pour order 320): 58.5,74.25 58.5,70.25 63,70.25 63,74.25
NetD7_BYPASS_0_2 on TOP SIG "NETD7_BYPASS_0_2_L01_P391" (solid, remove dead copper, pour order 391): 77.5,68.75 83.5,68.75 83.5,65.25 77.5,65.25
BCM_VCC on TOP SIG "BCM_VCC_L01_P366" (solid, remove dead copper, pour order 366): 72.5,53.5 78.5,53.5 78.5,51 72.5,51
M4_PRE_SHUNT_MOSFET_BANK_0 on TOP SIG "M4_PRE_SHUNT_MOSFET_BANK_0_L01_P334" (solid, remove dead copper, pour order 334): 73.5,55 78.5,55 78.5,53.5 73.5,53.5
BCM_VCC on TOP SIG "BCM_VCC_L01_P365" (solid, remove dead copper, pour order 365): 72.5,5.5 78.5,5.5 78.5,3 72.5,3
M4_PRE_SHUNT_MOSFET_BANK_3 on TOP SIG "M4_PRE_SHUNT_MOSFET_BANK_3_L01_P333" (solid, remove dead copper, pour order 333): 73.5,7 78.5,7 78.5,5.5 73.5,5.5
BCM_VCC on TOP SIG "BCM_VCC_L01_P363" (solid, remove dead copper, pour order 363): 72.5,21.5 78.5,21.5 78.5,19 72.5,19
M4_PRE_SHUNT_MOSFET_BANK_2 on TOP SIG "M4_PRE_SHUNT_MOSFET_BANK_2_L01_P331" (solid, remove dead copper, pour order 331): 73.5,23 78.5,23 78.5,21.5 73.5,21.5
BCM_VCC on TOP SIG "BCM_VCC_L01_P364" (solid, remove dead copper, pour order 364): 72.5,37.5 78.5,37.5 78.5,35 72.5,35
M4_PRE_SHUNT_MOSFET_BANK_1 on TOP SIG "M4_PRE_SHUNT_MOSFET_BANK_1_L01_P332" (solid, remove dead copper, pour order 332): 73.5,39 78.5,39 78.5,37.5 73.5,37.5
LED_C on TOP SIG "LED_C_L01_P403" (solid, remove dead copper, pour order 403): 90,138.5 90,141 85,141 85,138.5
LED_A on TOP SIG "LED_A_L01_P408" (solid, remove dead copper, pour order 408): 90,110.5 90,113 85,113 85,110.5
BCM_VCC on TOP SIG "BCM_VCC_L01_P383" (solid, remove dead copper, pour order 383): 64.75,4.5 68.5,4.5 68.5,3 64.75,3
BCM_VCC on TOP SIG "BCM_VCC_L01_P386" (solid, remove dead copper, pour order 386): 64.75,52.5 68.5,52.5 68.5,51 64.75,51
AMP_VCC on TOP SIG "AMP_VCC_L01_P420" (solid, remove dead copper, pour order 420): 8.5,127.75 8.5,123.5 14.5,123.5 14.5,127.75
BST_REG_OUT on TOP SIG "BST_REG_OUT_L01_P429" (solid, remove dead copper, pour order 429): 8.5,120.5 8.5,123.5 14.5,123.5 14.5,112 32,112 32,106 20,106 20,101.5 14,101.5 14,99 20,99 20,90.5 4.5,90.5 4.5,120.5
NetC63_1 on TOP SIG "NETC63_1_L01_P428" (solid, remove dead copper, pour order 428): 32,83 23,83 23,92.5 20,92.5 20,100 23,100 23,106 32,106
NetL3_1 on TOP SIG "NETL3_1_L01_P422" (solid, remove dead copper, pour order 422): 32,103 32,83 43.5,83 43.5,100.5 40,100.5 40,103
PRE_BST_AMP_VCC on TOP SIG "PRE_BST_AMP_VCC_L01_P421" (solid, remove dead copper, pour order 421): 49,103 49,110.5 54,110.5 54,115.5 44,115.5 44,112 32,112 32,103
AMP_VCC on TOP SIG "AMP_VCC_L01_P397" (solid, remove dead copper, pour order 397): 20.5,137 31,137 31,146.25 22.75,146.25 22.75,142.75 18.2,138.2 12.5,138.2 12.5,136.25 20.5,136.25
AMP_VCC on TOP SIG "AMP_VCC_L01_P393" (solid, remove dead copper, pour order 393): 20.5,133 31,133 31,123.75 22.75,123.75 22.75,127.25 18.2,131.8 12.5,131.8 12.5,133.75 20.5,133.75
PRE_OUT_D on TOP SIG "PRE_OUT_D_L01_P395" (solid, remove dead copper, pour order 395): 14.25,131.8 18.2,131.8 22.75,127.25 22.75,123.75 45.25,123.75 45.25,128 55,128 55,118 16.9,118 16.9,130.5 14.25,130.5
PRE_OUT_A on TOP SIG "PRE_OUT_A_L01_P396" (solid, remove dead copper, pour order 396): 14.25,138.2 18.2,138.2 22.75,142.75 22.75,146.25 45.25,146.25 45.25,142 55,142 55,152 16.9,152 16.9,139.5 14.25,139.5
NetU12_PWR_PROT_5_1 on TOP SIG "NETU12_PWR_PROT_5_1_L01_P398" (solid, remove dead copper, pour order 398): 90,152.5 85,152.5 85,142 90,142
NetU12_PWR_PROT_4_1 on TOP SIG "NETU12_PWR_PROT_4_1_L01_P399" (solid, remove dead copper, pour order 399): 90,138.5 85,138.5 85,128 90,128
NetU12_PWR_PROT_3_1 on TOP SIG "NETU12_PWR_PROT_3_1_L01_P400" (solid, remove dead copper, pour order 400): 90,124.5 85,124.5 85,114 90,114
NetU12_PWR_PROT_2_1 on TOP SIG "NETU12_PWR_PROT_2_1_L01_P401" (solid, remove dead copper, pour order 401): 90,110.5 85,110.5 85,100 90,100
LED_D on TOP SIG "LED_D_L01_P402" (solid, remove dead copper, pour order 402): 90,152.5 90,155 85,155 85,152.5
LED_B on TOP SIG "LED_B_L01_P406" (solid, remove dead copper, pour order 406): 90,124.5 90,127 85,127 85,124.5
NetU12_PWR_PROT_1_1 on TOP SIG "NETU12_PWR_PROT_1_1_L01_P412" (solid, remove dead copper, pour order 412): 54,96.5 58,96.5 58,86 50.5,86 50.5,93 54,93
BCM_VCC on TOP SIG "BCM_VCC_L01_P416" (solid, remove dead copper, pour order 416): 54,96.5 54,100 61.5,100 61.5,86 58,86 58,96.5
PRE_OUT_A on TOP SIG "PRE_OUT_A_L01_P419" (solid, remove dead copper, pour order 419): 14.25,133.75 18.75,133.75 18.75,134.5 14.25,134.5
PRE_OUT_D on TOP SIG "PRE_OUT_D_L01_P418" (solid, remove dead copper, pour order 418): 14.25,136.25 18.75,136.25 18.75,135.5 14.25,135.5
NetU19_3 on TOP SIG "NETU19_3_L01_P413" (solid, remove dead copper, pour order 413): 49,110.5 54,110.5 54,100 49,100
PRE_SHUNT on TOP SIG "PRE_SHUNT_L01_P410" (solid, remove dead copper, pour order 410): 85,96.5 80,96.5 80,93.5 85,93.5
NetD7_BYPASS_2_1 on TOP SIG "NETD7_BYPASS_2_1_L01_P389" (solid, remove dead copper, pour order 389): 88.5,76.25 83.5,76.25 83.5,72.75 88.5,72.75
NetD7_BYPASS_2_2 on TOP SIG "NETD7_BYPASS_2_2_L01_P392" (solid, remove dead copper, pour order 392): 77.5,76.25 83.5,76.25 83.5,72.75 77.5,72.75
NetD7_BYPASS_0_1 on TOP SIG "NETD7_BYPASS_0_1_L01_P387" (solid, remove dead copper, pour order 387): 88.5,68.75 83.5,68.75 83.5,65.25 88.5,65.25
BCM_VCC on TOP SIG "BCM_VCC_L01_P382" (solid, remove dead copper, pour order 382): 64.75,36.5 68.5,36.5 68.5,35 64.75,35
BCM_VCC on TOP SIG "BCM_VCC_L01_P379" (solid, remove dead copper, pour order 379): 64.75,20.5 68.5,20.5 68.5,19 64.75,19
BCM_VCC on TOP SIG "BCM_VCC_L01_P378" (solid, remove dead copper, pour order 378): 64.75,62.5 68.5,62.5 68.5,64 64.75,64
BCM_VCC on TOP SIG "BCM_VCC_L01_P377" (solid, remove dead copper, pour order 377): 64.75,14.5 68.5,14.5 68.5,16 64.75,16
BCM_VCC on TOP SIG "BCM_VCC_L01_P376" (solid, remove dead copper, pour order 376): 64.75,46.5 68.5,46.5 68.5,48 64.75,48
BCM_VCC on TOP SIG "BCM_VCC_L01_P375" (solid, remove dead copper, pour order 375): 64.75,30.5 68.5,30.5 68.5,32 64.75,32
BCM_VCC on TOP SIG "BCM_VCC_L01_P374" (solid, remove dead copper, pour order 374): 72.5,58.5 78.5,58.5 78.5,56.5 72.5,56.5
BCM_VCC on TOP SIG "BCM_VCC_L01_P373" (solid, remove dead copper, pour order 373): 72.5,10.5 78.5,10.5 78.5,8.5 72.5,8.5
BCM_VCC on TOP SIG "BCM_VCC_L01_P372" (solid, remove dead copper, pour order 372): 72.5,42.5 78.5,42.5 78.5,40.5 72.5,40.5
BCM_VCC on TOP SIG "BCM_VCC_L01_P371" (solid, remove dead copper, pour order 371): 72.5,26.5 78.5,26.5 78.5,24.5 72.5,24.5
BCM_VCC on TOP SIG "BCM_VCC_L01_P370" (solid, remove dead copper, pour order 370): 72.5,61.5 76.5,61.5 76.5,64 72.5,64
BCM_VCC on TOP SIG "BCM_VCC_L01_P369" (solid, remove dead copper, pour order 369): 72.5,13.5 76.5,13.5 76.5,16 72.5,16
BCM_VCC on TOP SIG "BCM_VCC_L01_P368" (solid, remove dead copper, pour order 368): 72.5,45.5 76.5,45.5 76.5,48 72.5,48
BCM_VCC on TOP SIG "BCM_VCC_L01_P367" (solid, remove dead copper, pour order 367): 72.5,29.5 76.5,29.5 76.5,32 72.5,32
M3_OUT_MOSFET_BANK_0 on TOP SIG "M3_OUT_MOSFET_BANK_0_L01_P362" (solid, remove dead copper, pour order 362): 81,54 78.5,54 78.5,49.5 89,49.5 89,51.5 81,51.5
M3_OUT_MOSFET_BANK_3 on TOP SIG "M3_OUT_MOSFET_BANK_3_L01_P361" (solid, remove dead copper, pour order 361): 81,6 78.5,6 78.5,1.5 89,1.5 89,3.5 81,3.5
M3_OUT_MOSFET_BANK_1 on TOP SIG "M3_OUT_MOSFET_BANK_1_L01_P360" (solid, remove dead copper, pour order 360): 81,38 78.5,38 78.5,33.5 89,33.5 89,35.5 81,35.5
M3_OUT_MOSFET_BANK_2 on TOP SIG "M3_OUT_MOSFET_BANK_2_L01_P343" (solid, remove dead copper, pour order 343): 81,22 78.5,22 78.5,17.5 89,17.5 89,19.5 81,19.5
M1_OUT_MOSFET_BANK_0 on TOP SIG "M1_OUT_MOSFET_BANK_0_L01_P342" (solid, remove dead copper, pour order 342): 81,61 78.5,61 78.5,56.5 89,56.5 89,58.5 81,58.5
M1_OUT_MOSFET_BANK_3 on TOP SIG "M1_OUT_MOSFET_BANK_3_L01_P341" (solid, remove dead copper, pour order 341): 81,13 78.5,13 78.5,8.5 89,8.5 89,10.5 81,10.5
M1_OUT_MOSFET_BANK_1 on TOP SIG "M1_OUT_MOSFET_BANK_1_L01_P340" (solid, remove dead copper, pour order 340): 81,45 78.5,45 78.5,40.5 89,40.5 89,42.5 81,42.5
M1_OUT_MOSFET_BANK_2 on TOP SIG "M1_OUT_MOSFET_BANK_2_L01_P339" (solid, remove dead copper, pour order 339): 81,29 78.5,29 78.5,24.5 89,24.5 89,26.5 81,26.5
M2_PRE_SHUNT_MOSFET_BANK_0 on TOP SIG "M2_PRE_SHUNT_MOSFET_BANK_0_L01_P338" (solid, remove dead copper, pour order 338): 73.5,60 78.5,60 78.5,58.5 73.5,58.5
M2_PRE_SHUNT_MOSFET_BANK_3 on TOP SIG "M2_PRE_SHUNT_MOSFET_BANK_3_L01_P337" (solid, remove dead copper, pour order 337): 73.5,12 78.5,12 78.5,10.5 73.5,10.5
M2_PRE_SHUNT_MOSFET_BANK_1 on TOP SIG "M2_PRE_SHUNT_MOSFET_BANK_1_L01_P336" (solid, remove dead copper, pour order 336): 73.5,44 78.5,44 78.5,42.5 73.5,42.5
M2_PRE_SHUNT_MOSFET_BANK_2 on TOP SIG "M2_PRE_SHUNT_MOSFET_BANK_2_L01_P335" (solid, remove dead copper, pour order 335): 73.5,28 78.5,28 78.5,26.5 73.5,26.5
M3_PRE_SHUNT_MOSFET_BANK_0 on TOP SIG "M3_PRE_SHUNT_MOSFET_BANK_0_L01_P330" (solid, remove dead copper, pour order 330): 73.5,56.5 81,56.5 81,54 78.5,54 78.5,55 73.5,55
M3_PRE_SHUNT_MOSFET_BANK_3 on TOP SIG "M3_PRE_SHUNT_MOSFET_BANK_3_L01_P329" (solid, remove dead copper, pour order 329): 73.5,8.5 81,8.5 81,6 78.5,6 78.5,7 73.5,7
M3_PRE_SHUNT_MOSFET_BANK_1 on TOP SIG "M3_PRE_SHUNT_MOSFET_BANK_1_L01_P328" (solid, remove dead copper, pour order 328): 73.5,40.5 81,40.5 81,38 78.5,38 78.5,39 73.5,39
M3_PRE_SHUNT_MOSFET_BANK_2 on TOP SIG "M3_PRE_SHUNT_MOSFET_BANK_2_L01_P327" (solid, remove dead copper, pour order 327): 73.5,24.5 81,24.5 81,22 78.5,22 78.5,23 73.5,23
M1_PRE_SHUNT_MOSFET_BANK_0 on TOP SIG "M1_PRE_SHUNT_MOSFET_BANK_0_L01_P326" (solid, remove dead copper, pour order 326): 81,64 81,61 78.5,61 78.5,60 73.5,60 73.5,61.5 76.5,61.5 76.5,64
M1_PRE_SHUNT_MOSFET_BANK_3 on TOP SIG "M1_PRE_SHUNT_MOSFET_BANK_3_L01_P325" (solid, remove dead copper, pour order 325): 81,16 81,13 78.5,13 78.5,12 73.5,12 73.5,13.5 76.5,13.5 76.5,16
M1_PRE_SHUNT_MOSFET_BANK_1 on TOP SIG "M1_PRE_SHUNT_MOSFET_BANK_1_L01_P324" (solid, remove dead copper, pour order 324): 81,48 81,45 78.5,45 78.5,44 73.5,44 73.5,45.5 76.5,45.5 76.5,48
M1_PRE_SHUNT_MOSFET_BANK_2 on TOP SIG "M1_PRE_SHUNT_MOSFET_BANK_2_L01_P323" (solid, remove dead copper, pour order 323): 81,32 81,29 78.5,29 78.5,28 73.5,28 73.5,29.5 76.5,29.5 76.5,32
GND on BOT SIG "GND_L04_P427" (solid, remove dead copper, pour order 427): 0.068,4.006 0.068,152.006 cw(c4.068,152.006) 4.068,156.006 106.068,156.006 cw(c106.068,152.006) 110.068,152.006 110.068,4.006 cw(c106.068,4.006) 106.068,0.006 4.068,0.006 cw(c4.068,4.006)
NetD7_BYPASS_1_2 on BOT SIG "NETD7_BYPASS_1_2_L04_P384" (solid, remove dead copper, pour order 384): 77.5,68.75 83.5,68.75 83.5,72.25 77.5,72.25
NetD7_BYPASS_1_1 on BOT SIG "NETD7_BYPASS_1_1_L04_P380" (solid, remove dead copper, pour order 380): 88.5,68.75 83.5,68.75 83.5,72.25 88.5,72.25
3V3 on BOT SIG "3V3_L04_P423" (solid, pour order 423): 58.75,70.5 67.75,70.5 67.75,74.5 58.75,74.5
PRE_SHUNT on BOT SIG "PRE_SHUNT_L04_P405" (solid, remove dead copper, pour order 405): 80,85.5 85,85.5 85,96.5 80,96.5
AMP_VCC on BOT SIG "AMP_VCC_L04_P417" (solid, remove dead copper, pour order 417): 8.5,125.75 8.5,138.25 14.5,138.25 14.5,125.75
PRE_OUT_A on BOT SIG "PRE_OUT_A_L04_P414" (solid, remove dead copper, pour order 414): 16.25,134.75 18.75,134.75 18.75,136.25 16.25,136.25 16.25,139.5 20.75,139.5 20.75,133.25 16.25,133.25
PRE_OUT_D on BOT SIG "PRE_OUT_D_L04_P415" (solid, remove dead copper, pour order 415): 18.75,135.25 16.25,135.25 16.25,133.25 18.75,133.25 18.75,130.5 14.25,130.5 14.25,136.25 18.75,136.25
NetD7_BYPASS_3_2 on BOT SIG "NETD7_BYPASS_3_2_L04_P385" (solid, remove dead copper, pour order 385): 77.5,76.25 83.5,76.25 83.5,79.75 77.5,79.75
PWR_IN on BOT SIG "PWR_IN_L04_P407" (solid, remove dead copper, pour order 407): 85,93.5 90,93.5 90,103 106,103 106,85.5 85,85.5
NetQ1_5-6-7-8 on BOT SIG "NETQ1_5-6-7-8_L04_P404" (solid, remove dead copper, pour order 404): 71,93.5 77.5,93.5 77.5,85.5 71,85.5
PRE_VCC on BOT SIG "PRE_VCC_L04_P388" (solid, remove dead copper, pour order 388): 79.86,86.425 79.36,86.425 78.16,87 77.66,87 77.66,92.65 78.16,92.65 79.36,92.075 79.86,92.075
NetD7_BYPASS_3_1 on BOT SIG "NETD7_BYPASS_3_1_L04_P381" (solid, remove dead copper, pour order 381): 88.5,76.25 83.5,76.25 83.5,79.75 88.5,79.75
M4_PRE_SHUNT_MOSFET_BANK_0 on BOT SIG "M4_PRE_SHUNT_MOSFET_BANK_0_L04_P359" (solid, remove dead copper, pour order 359): 76,56.5 78.5,56.5 78.5,52 81,52 81,49.5 76,49.5
M4_PRE_SHUNT_MOSFET_BANK_3 on BOT SIG "M4_PRE_SHUNT_MOSFET_BANK_3_L04_P358" (solid, remove dead copper, pour order 358): 76,8.5 78.5,8.5 78.5,4 81,4 81,1.5 76,1.5
M4_PRE_SHUNT_MOSFET_BANK_1 on BOT SIG "M4_PRE_SHUNT_MOSFET_BANK_1_L04_P357" (solid, remove dead copper, pour order 357): 76,40.5 78.5,40.5 78.5,36 81,36 81,33.5 76,33.5
M4_PRE_SHUNT_MOSFET_BANK_2 on BOT SIG "M4_PRE_SHUNT_MOSFET_BANK_2_L04_P356" (solid, remove dead copper, pour order 356): 76,24.5 78.5,24.5 78.5,20 81,20 81,17.5 76,17.5
M2_PRE_SHUNT_MOSFET_BANK_0 on BOT SIG "M2_PRE_SHUNT_MOSFET_BANK_0_L04_P355" (solid, remove dead copper, pour order 355): 76,63.5 78.5,63.5 78.5,59 81,59 81,56.5 76,56.5
M2_PRE_SHUNT_MOSFET_BANK_3 on BOT SIG "M2_PRE_SHUNT_MOSFET_BANK_3_L04_P354" (solid, remove dead copper, pour order 354): 76,15.5 78.5,15.5 78.5,11 81,11 81,8.5 76,8.5
M2_PRE_SHUNT_MOSFET_BANK_1 on BOT SIG "M2_PRE_SHUNT_MOSFET_BANK_1_L04_P353" (solid, remove dead copper, pour order 353): 76,47.5 78.5,47.5 78.5,43 81,43 81,40.5 76,40.5
M2_PRE_SHUNT_MOSFET_BANK_2 on BOT SIG "M2_PRE_SHUNT_MOSFET_BANK_2_L04_P352" (solid, remove dead copper, pour order 352): 76,31.5 78.5,31.5 78.5,27 81,27 81,24.5 76,24.5
M2_OUT_MOSFET_BANK_0 on BOT SIG "M2_OUT_MOSFET_BANK_0_L04_P351" (solid, remove dead copper, pour order 351): 81,59 78.5,59 78.5,63.5 89,63.5 89,61.5 81,61.5
M2_OUT_MOSFET_BANK_3 on BOT SIG "M2_OUT_MOSFET_BANK_3_L04_P350" (solid, remove dead copper, pour order 350): 81,11 78.5,11 78.5,15.5 89,15.5 89,13.5 81,13.5
M2_OUT_MOSFET_BANK_1 on BOT SIG "M2_OUT_MOSFET_BANK_1_L04_P349" (solid, remove dead copper, pour order 349): 81,43 78.5,43 78.5,47.5 89,47.5 89,45.5 81,45.5
M2_OUT_MOSFET_BANK_2 on BOT SIG "M2_OUT_MOSFET_BANK_2_L04_P348" (solid, remove dead copper, pour order 348): 81,27 78.5,27 78.5,31.5 89,31.5 89,29.5 81,29.5
M4_OUT_MOSFET_BANK_0 on BOT SIG "M4_OUT_MOSFET_BANK_0_L04_P347" (solid, remove dead copper, pour order 347): 81,52 78.5,52 78.5,56.5 89,56.5 89,54.5 81,54.5
M4_OUT_MOSFET_BANK_3 on BOT SIG "M4_OUT_MOSFET_BANK_3_L04_P346" (solid, remove dead copper, pour order 346): 81,4 78.5,4 78.5,8.5 89,8.5 89,6.5 81,6.5
M4_OUT_MOSFET_BANK_1 on BOT SIG "M4_OUT_MOSFET_BANK_1_L04_P345" (solid, remove dead copper, pour order 345): 81,36 78.5,36 78.5,40.5 89,40.5 89,38.5 81,38.5
M4_OUT_MOSFET_BANK_2 on BOT SIG "M4_OUT_MOSFET_BANK_2_L04_P344" (solid, remove dead copper, pour order 344): 81,20 78.5,20 78.5,24.5 89,24.5 89,22.5 81,22.5
GND on PWR "GND_L03_P426" (solid, remove dead copper, pour order 426): 0,4 0,152 cw(c4,152) 4,156 106,156 cw(c106,152) 110,152 110,4 cw(c106,4) 106,0 4,0 cw(c4,4)
BCM_VCC on PWR "BCM_VCC_L03_P411" (solid, remove dead copper, pour order 411): 64,93 58,93 58,63.5 60.25,63.5 60.25,3.25 68.5,3.25 68.5,86 64,86
BCM_VCC on PWR "BCM_VCC_L03_P424" (solid, pour order 424): 73,61.75 70.5,64.25 68.5,64.25 68.5,77 81.5,64 81.5,4 73,4
GND on GND "GND_L02_P425" (solid, remove dead copper, pour order 425): 0,4 0,152 cw(c4,152) 4,156 106,156 cw(c106,152) 110,152 110,4 cw(c106,4) 106,0 4,0 cw(c4,4)

## Silkscreen, mask and mechanical layers (free items; w line width, h text height)
Top Overlay:
  drawing of 19 lines, arcs and shapes, not listed
  text "LED D / (5A)" at 72.967,150 h1
  text "LED C / (5A)" at 72.967,136 h1
  text "LED B / (5A)" at 72.967,122 h1
  text "LED A / (5A)" at 72.967,108 h1
  text "AMP / (20A)" at 60.467,107.788 h1
  text "BCM / (7.5A)" at 60.301,94 h1
  text "MAIN / (30A)" at 72.967,94 h1
  text "WAKE" at 3.167,46.7 h1
  text "BOOT" at 3.167,40.7 h1
  text "RST" at 3.667,34.7 h1
  text "PWR" at 23.667,27.2 h1
  text "MCU" at 28.667,27.2 h1
  text "BCM ECU" at 3.5,15 h5
  text "Project:" at 3.5,10.667 h2
  text "BRZ" at 21.35,10.35 h2
  text "Revision:" at 3.5,7 h2
  text "revA" at 21.35,6.85 h2
  text "Date:" at 3.5,3 h2
  text "20/09/2025" at 21.35,2.85 h2
Mechanical 1:
  the board outline again, w0.15

## Text inside footprints (layer, text, board x,y; h text height)
U8: Top 3D Body "*" at 37.8,30.991 h1.27 r270; Top Overlay "*" at 38.678,32.115 h1.27 r270